# Altium PCB PCB1.PcbDoc (part 2 of 2)
Units mm, origin at the board's own origin, x right, y up, seen from the top; angles counter-clockwise.
Board outline 52.81 x 140.21 mm, 4 copper layers (Top Layer, Int1 (GND), Int2 (PWR), Bottom Layer), stack 1.566 mm thick; 98 components, 47 nets, 264 pads, 608 vias.
Unrouted connection lines stored in the file: 7.
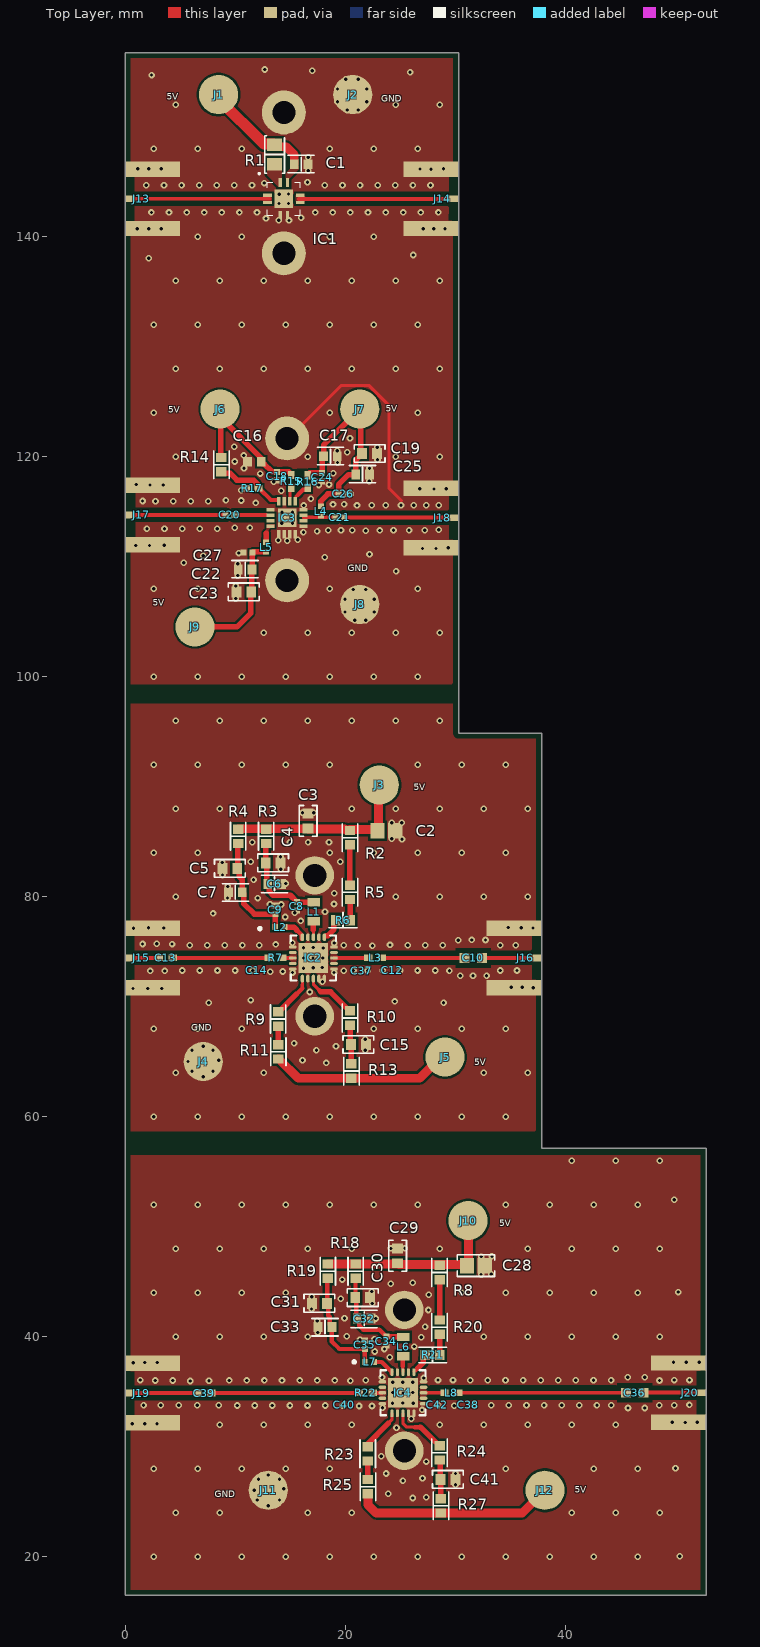
[diagram p0: Top Layer view]

## Via types
v1: diameter 0.6, hole 0.3, Top Layer to Bottom Layer, 398 vias
v2: diameter 0.6, hole 0.3, Top Layer to Bottom Layer, tented both sides, 210 vias

## Nets (pads, with @x,y where several pads share a name; then routed paths per layer and width w, separated by ;. In a path a pad name is that pad's centre, name@x,y a point inside that pad or via, vN(x,y) a via of type N, cw(c..) or ccw(c..) an arc to the next point about the centre after c; other vN are vias at no path point) (continued)
GND: (continued)
  other v2: 2.6,20 6.6,20 10.6,20 14.6,20 18.6,20 22.6,20 26.6,20 30.6,20 34.6,20 38.6,20 42.6,20 46.6,20 50.419,20.066 4.6,24 8.6,24 16.6,24 20.6,24 40.6,24 44.6,24 48.6,24 2.6,28 6.6,28 10.6,28 14.6,28 18.6,28 34.6,28 42.6,28 46.6,28 50.038,28.067 8.6,32 12.6,32 16.6,32 20.6,32 28.6,32 32.6,32 36.6,32 40.6,32 44.6,32 4.6,40 8.6,40 12.6,40 16.6,40 32.6,40 36.6,40 40.6,40 44.6,40 48.6,40 2.6,44 6.6,44 10.6,44 14.6,44 30.6,44 34.6,44 38.6,44 42.6,44 46.6,44 50.292,44.069 4.6,48 8.6,48 12.6,48 16.6,48 20.6,48 28.6,48 36.6,48 40.6,48 44.6,48 48.6,48 2.6,52 6.6,52 10.6,52 14.6,52 18.6,52 22.6,52 26.6,52 34.6,52 38.6,52 42.6,52 46.6,52 49.911,52.451 40.6,56 44.6,56 48.6,56 2.6,60 6.6,60 10.6,60 14.6,60 18.6,60 22.6,60 26.6,60 30.6,60 34.6,60 4.6,64 12.6,64 32.6,64 36.6,64 2.6,68 6.6,68 10.6,68 22.6,68 26.6,68 30.6,68 34.6,68 7.62,70.358 28.956,70.358 24.511,70.485 11.43,70.612 8.001,78.486 4.6,80 24.6,80 28.6,80 32.6,80 36.6,80 2.6,84 6.6,84 18.6,84 22.6,84 26.6,84 30.6,84 34.6,84 4.6,88 8.6,88 12.6,88 20.6,88 24.6,88 28.6,88 32.6,88 36.6,88 2.6,92 6.6,92 10.6,92 14.6,92 18.6,92 26.6,92 30.6,92 34.6,92 4.6,96 8.6,96 12.6,96 16.6,96 20.6,96 24.6,96 28.6,96 2.6,100 6.6,100 10.6,100 14.6,100 18.6,100 22.6,100 26.6,100 12.6,104 16.6,104 20.6,104 24.6,104 28.6,104 2.6,108 6.6,108 18.6,108 26.6,108 24.638,109.601 5.334,110.363 18.161,110.871 7.112,110.998 22.225,111.125 4.6,120 16.6,120 24.6,120 28.6,120 2.6,124 18.6,124 26.6,124 4.6,128 8.6,128 12.6,128 16.6,128 20.6,128 24.6,128 28.6,128 2.6,132 6.6,132 10.6,132 14.6,132 18.6,132 22.6,132 26.6,132 4.6,136 8.6,136 12.6,136 16.6,136 20.6,136 24.6,136 28.6,136 2.159,138.049 26.207,138.329 6.6,140 10.6,140 18.6,140 22.6,140 2.6,148 6.6,148 10.6,148 18.6,148 22.6,148 26.6,148 4.6,152 24.6,152 28.6,152 2.413,154.686 25.908,154.94 17.018,155.067 12.7,155.194
NetC4_2: C4.2 C6.2 C8.2 L1.2 R3.1 | length 8.9
  Top Layer w0.5: R3.1 12.808,84.824 12.808,83.061 12.876,82.993 12.876,81.265 C6.2 13.115,81.026 13.115,80.484 13.462,80.137 15.019,80.137 15.597,79.559 15.602,79.559 15.622,79.539 C8.2 15.622,79.531 15.642,79.511 L1.2
NetC5_1: C5.1 C7.1 C9.1 L2.2 R4.1 | length 10.2
  Top Layer w0.5: R4.1 10.244,84.801 10.244,82.617 C5.1 10.401,82.373 10.401,81.801 10.668,81.534 10.668,80.424 C7.1 10.809,80.264 10.809,79.361 11.75,78.42 C9.1 13.661,78.416 13.661,77.243 L2.2
NetC10_1: C10.1 L3.2 | length 7.5
  Top Layer w0.358: L3.2 C10.1
NetC10_2: C10.2 J16.1 | length 5
  Top Layer w0.358: C10.2 J16.1
NetC11_2: IC2.12 IC2.13 IC2.14 L3.1 | length 3.1
  Top Layer w0.358: IC2.13 L3.1
NetC13_1: C13.1 J15.1 | length 2.6
  Top Layer w0.358: J15.1 C13.1
NetC13_2: C13.2 R7.1 | length 8.7
  Top Layer w0.358: C13.2 R7.1
NetC15_1: C15.1 R10.1 R13.2 | length 3.6
  Top Layer w0.5: R10.1 20.491,68.291 20.491,66.615 C15.1 20.555,66.551 20.555,64.828 R13.2
NetC20_1: C20.1 J17.1 | length 8.7
  Top Layer w0.358: J17.1 C20.1
NetC20_2: C20.2 IC3.2 | length 2.9
  Top Layer w0.358: C20.2@9.933,114.688 12.827,114.688
NetC21_1: C21.1 IC3.10 IC3.11 L4.1 | length 2.9
  Top Layer w0.358: 16.257,114.45 16.3,114.493 C21.1
NetC21_2: C21.2 J18.1 | length 10
  Top Layer w0.358: C21.2 19.917,114.467 29.838,114.467 J18.1
NetC30_2: C30.2 C32.2 C34.2 L6.2 R18.1 | length 8.9
  Top Layer w0.4: R18.1 20.949,45.301 20.949,43.538 21.017,43.47 21.017,41.742 C32.2 21.306,41.453 21.306,41.012 21.659,40.658 23.116,40.658 23.688,40.086 23.693,40.086 23.774,40.005 C34.2@23.774,40 ; L6.2@25.275,40 L6.2
  Top Layer w0.5: C34.2@23.774,40 L6.2@25.275,40
NetC31_1: C31.1 C33.1 C35.1 L7.2 R19.1 | length 10.4
  Top Layer w0.4: R19.1 18.385,45.278 18.385,43.094 C31.1 18.484,42.908 18.484,41.928 18.6,41.813 18.6,41.091 C33.1 18.8,39.581 19.484,38.897 C35.1 21.802,38.893 21.802,37.72 L7.2
NetC36_1: C36.1 L8.2 | length 15.3
  Top Layer w0.358: L8.2 C36.1
NetC36_2: C36.2 J20.1 | length 5.2
  Top Layer w0.358: C36.2 47.147,34.921 52.37,34.921 J20.1
NetC37_2: IC4.12 IC4.13 IC4.14 L8.1 | length 1.9
  Top Layer w0.358: IC4.13 L8.1
NetC39_1: C39.1 J19.1 | length 6.1
  Top Layer w0.358: J19.1 C39.1
NetC39_2: C39.2 R22.1 | length 13.4
  Top Layer w0.358: C39.2 7.851,34.899 21.25,34.899 R22.1
NetC41_1: C41.1 R24.1 R27.2 | length 3.6
  Top Layer w0.5: R24.1 28.632,28.768 28.632,27.092 C41.1 28.696,27.028 28.696,25.305 R27.2
NetIC1_1: IC1.1 IC1.2 J13.1 | length 12.7
  Top Layer w0.358: J13.1@0.452,143.443 13.13,143.443
NetIC1_5: IC1.5 IC1.6 J14.1 | length 14
  Top Layer w0.358: 15.813,143.442 J14.1
NetIC1_8: IC1.8 R1.1
NetIC2_2: IC2.2 IC2.3 IC2.4 R7.2 | length 0.9
  Top Layer w0.358: R7.2 IC2.3
NetIC2_6: IC2.6 R9.2 | length 4
  Top Layer w0.29: IC2.6 16.122,72.563 16.122,72.016
  Top Layer w0.3: 16.122,71.684 16.122,72.015
  Top Layer w0.4: 15.558,71.12 16.122,71.684
  Top Layer w0.5: R9.2 13.973,69.537 15.555,71.12
NetIC2_8: IC2.8 R10.2 | length 4.9
  Top Layer w0.29: IC2.8 17.122,72.563 17.122,72.032 17.653,71.501
  Top Layer w0.4: 17.653,71.501 17.802,71.352
  Top Layer w0.5: 17.802,71.352 18.68,71.352 20.223,69.809 20.352,69.809 R10.2@20.493,69.668
NetIC2_16: IC2.16 R6.1 | length 1.9
  Top Layer w0.5: 18.288,76.454 18.415,76.454 18.988,77.027 18.988,77.699 R6.1
NetIC2_18: IC2.18 L1.1 | length 1.4
  Top Layer w0.29: IC2.18 17.12,76.937
  Top Layer w0.3: 17.12,76.937 17.145,76.962
  Top Layer w0.5: 17.127,76.98 L1.1@17.127,77.743
NetIC2_20: IC2.20 L2.1 | length 2.1
  Top Layer w0.4: 15.621,76.962 16.044,76.539 IC2.20@16.044,76.191
  Top Layer w0.5: L2.1 15.344,77.239 15.621,76.962
NetIC3_4: IC3.4 L5.2 | length 0.8
  Top Layer w0.5: L5.2 12.828,113.029
NetIC3_13: IC3.13 R16.1 | length 1.4
  Top Layer w0.3: 15.535,116.332 15.535,116.349 15.719,116.533
  Top Layer w0.4: 15.719,116.533 16.178,116.992 16.497,116.992 16.597,117.092 R16.1@16.597,117.132
NetIC3_14: IC3.14 R15.1 | length 0.9
  Top Layer w0.29: 14.986,116.332 14.986,117.05 R15.1
NetIC3_16: IC3.16 R14.1 R17.2 | length 6.4
  Top Layer w0.4: R17.2@12.208,117.117 13.26,116.065 IC3.16@13.883,116.065
  Top Layer w0.5: R14.1 8.917,118.473 9.571,118.473 10.177,117.867 11.68,117.867 12.008,117.54 12.008,117.167 12.058,117.117 R17.2 R17.2@12.208,117.117
NetIC4_2: IC4.2 IC4.3 IC4.4 R22.2 | length 0.9
  Top Layer w0.358: R22.2 22.512,34.912 IC4.3@23.38,34.912
NetIC4_6: IC4.6 R23.2 | length 3.8
  Top Layer w0.29: 23.945,32.149 24.258,32.462 24.258,33.039 IC4.6
  Top Layer w0.5: R23.2@21.98,30.19 21.986,30.19 23.945,32.149
NetIC4_8: IC4.8 R24.2 | length 5.1
  Top Layer w0.29: IC4.8 25.261,32.137 25.601,31.796
  Top Layer w0.3: 25.601,31.796 26.33,31.796 26.333,31.794 ; R24.2@28.539,30.111 R24.2
  Top Layer w0.4: 26.333,31.794 26.856,31.794
  Top Layer w0.5: 26.856,31.794 R24.2@28.539,30.111
NetIC4_16: IC4.16 R21.1 | length 2
  Top Layer w0.3: IC4.16@26.263,36.848 26.317,36.848 26.591,37.123
  Top Layer w0.5: 26.591,37.123 27.129,37.66 27.129,38.176 R21.1
NetIC4_18: IC4.18 L6.1 | length 1.5
  Top Layer w0.29: 25.258,37.313 25.258,36.795 IC4.18
  Top Layer w0.4: 25.258,37.313 25.258,38.21 L6.1
NetIC4_20: IC4.20 L7.1 | length 2.1
  Top Layer w0.29: IC4.20@24.204,36.627 IC4.20@24.204,36.843
  Top Layer w0.4: L7.1 23.331,37.716 IC4.20@24.204,36.843
NetR2_1: R2.1 R5.1 | length 3.7
  Top Layer w0.5: R5.1 R2.1
NetR5_2: R5.2 R6.2 | length 1.9
  Top Layer w0.5: R5.2 20.455,79.742 20.455,77.882 R6.2
NetR8_1: R8.1 R20.1 | length 3.7
  Top Layer w0.5: R20.1 R8.1
NetR9_1: R9.1 R11.2 | length 1.7
  Top Layer w0.5: R9.1 13.928,68.232 13.928,66.561 R11.2
NetR20_2: R20.2 R21.2 | length 1.9
  Top Layer w0.5: R20.2 28.596,40.219 28.596,38.359 R21.2
NetR23_1: R23.1 R25.2 | length 1.7
  Top Layer w0.5: R23.1 22.069,28.709 22.069,27.038 R25.2
pads on no net: IC3.3

## Polygon pours and split planes (outlines as drawn)
GND on Top Layer "NONET_L01_P-001" (solid, pour order 4): -0.476,94.107 31.877,94.107 31.877,157.48 -0.51,157.48
GND on Top Layer "NONET_L01_P-001" (solid, pour order 11): -1.016,94.361 38.989,94.361 38.989,56.007 -1.016,56.007
GND on Top Layer "NONET_L01_P-001" (solid, pour order 12): -2.159,56.521 -2.159,15.494 54.61,15.494 54.61,56.513
NetIC2_2 on Top Layer "NONET_L01_P-001" (solid, pour order 14): 14.919,74.62 15.238,74.939 15.596,74.939 15.596,73.937 15.594,73.935 15.238,73.935 14.919,74.262
NetIC4_2 on Top Layer "NONET_L01_P-001" (solid, pour order 17): 23.055,35.096 23.373,35.414 23.731,35.414 23.731,34.413 23.729,34.411 23.373,34.411 23.055,34.738
NetC37_2 on Top Layer "NONET_L01_P-001" (solid, pour order 16): 27.465,34.737 27.147,34.419 26.789,34.419 26.789,35.42 26.791,35.422 27.147,35.422 27.465,35.095
NetC11_2 on Top Layer "NONET_L01_P-001" (solid, pour order 15): 19.324,74.263 19.006,73.944 18.648,73.944 18.648,74.946 18.65,74.948 19.006,74.948 19.324,74.621
NetIC3_4 on Top Layer "NONET_L01_P-001" (solid, pour order 9): 12.578,113.037 12.578,113.56 12.588,113.56 12.866,113.838 13.602,113.838 13.602,113.546 13.605,113.543 13.079,113.018 13.079,112.951 12.581,112.951 12.578,112.953
NetIC1_1 on Top Layer "NONET_L01_P-001" (solid, pour order 0): 12.514,143.62 12.556,143.662 13.342,143.662 13.342,143.191 13.329,143.178 13.287,143.22 12.563,143.22 12.518,143.264
NetIC1_5 on Top Layer "NONET_L01_P-001" (solid, pour order 3): 16.377,143.618 16.252,143.743 15.539,143.743 15.539,143.213 15.569,143.183 16.296,143.183 16.377,143.263
5V on Top Layer "NONET_L01_P-001" (solid, pour order 2): 14.614,145.32 14.614,145.768 15.253,146.407 15.778,146.407 15.778,146.131 14.913,145.266 14.913,145.265 14.614,145.265
NetIC1_8 on Top Layer "NONET_L01_P-001" (solid, pour order 1): 13.956,144.53 12.917,145.569 12.917,146.11 14.264,146.11 14.253,146.099 14.253,144.531
no net on Top Solder "NONET_L01_P-001" (solid): -0.107,36.948 -0.107,32.902 52.921,32.902 52.921,36.948
no net on Top Solder "NONET_L01_P-001" (solid): -0.112,76.472 -0.112,72.426 37.968,72.426 37.968,76.472
no net on Top Solder "NONET_L01_P-001" (solid): 0,117.094 0,112.294 30.416,112.294 30.416,117.094
no net on Top Solder "NONET_L01_P-001" (solid): 0,145.389 30.394,145.389 30.394,141.509 0,141.509
GND on Bottom Layer "NONET_L01_P-001" (solid, pour order 13): 52.813,16.51 52.813,57.017 52.817,57.021 52.686,57.152 37.863,57.152 37.863,94.869 30.314,94.869 30.314,156.718 0,156.718 0,16.51
no net on Bottom Solder "NONET_L01_P-001" (solid): 52.813,16.51 52.813,57.017 52.817,57.021 52.686,57.152 37.863,57.152 37.863,94.869 30.314,94.869 30.314,156.718 0,156.718 0,16.51
GND on Int2 (PWR) (split plane): 37.759,56.651 37.761,56.651 37.763,56.65 37.811,56.646 37.859,56.641 37.861,56.641 37.863,56.641 37.873,56.642 52.302,56.642 52.302,17.02 0.51,17.02 0.51,56.598 37.747,56.655
GND on Int2 (PWR) (split plane): 29.803,94.869 29.813,94.769 29.842,94.674 29.889,94.585 29.953,94.508 30.03,94.445 30.119,94.397 30.214,94.368 30.314,94.359 37.352,94.359 37.353,58.659 0.51,58.603 0.51,97.423 29.803,97.423
GND on Int2 (PWR) (split plane): 29.803,99.427 0.51,99.427 0.51,156.208 29.803,156.208
GND on Int1 (GND) (split plane): 52.302,17.02 0.51,17.02 0.51,56.516 38.117,56.641 38.12,56.642 52.302,56.642
GND on Int1 (GND) (split plane): 29.803,94.869 29.813,94.769 29.842,94.674 29.889,94.585 29.953,94.508 30.03,94.445 30.119,94.397 30.214,94.368 30.314,94.359 37.352,94.359 37.353,58.643 0.51,58.52 0.51,97.423 29.803,97.423
GND on Int1 (GND) (split plane): 29.803,99.427 0.51,99.427 0.51,156.208 29.803,156.208

## Other copper
Top Layer:
  pour cut-out: 0.508,97.536 29.801,97.536 29.801,99.314 0.508,99.314
  pour cut-out: 0.508,56.515 39.116,56.515 39.116,58.674 0.508,58.674
  pour cut-out: 51.913,32.802 51.913,36.927 52.294,36.927 52.294,32.802
  pour cut-out: 0.508,32.893 0.508,36.892 0.889,36.892 0.889,32.893
  pour cut-out: 44.713,33.995 44.713,34.237 47.973,34.237 47.973,33.995
  pour cut-out: 44.713,35.597 44.713,35.832 47.973,35.832 47.973,35.597
  pour cut-out: 27.691,34.347 27.691,34.237 52.297,34.237 52.297,34.347
  pour cut-out: 27.704,35.487 27.704,35.597 52.195,35.597 52.195,35.487
  pour cut-out: 0.889,34.212 0.889,34.309 22.931,34.368 22.931,34.212
  pour cut-out: 0.439,116.702 0.958,116.702 0.958,112.697 0.439,112.697
  pour cut-out: 29.406,116.469 29.838,116.469 29.838,112.465 29.406,112.465
  pour cut-out: 36.967,76.447 37.573,76.447 37.573,72.443 36.968,72.443
  pour cut-out: 0.508,76.44 0.899,76.44 0.899,72.436 0.508,72.436
  pour cut-out: 22.906,35.587 22.906,35.462 0.889,35.462 0.889,35.587
  pour cut-out: 36.967,73.76 36.967,73.871 19.487,73.871 19.487,73.76
  pour cut-out: 30.014,73.517 30.014,73.787 33.274,73.787 33.274,73.517
  pour cut-out: 30.014,75.057 30.014,75.36 33.274,75.36 33.274,75.057
  pour cut-out: 19.477,75.12 19.477,75.01 36.967,75.01 36.967,75.12
  pour cut-out: 14.753,73.871 14.753,73.76 0.899,73.76 0.899,73.871
  pour cut-out: 14.753,75.12 14.753,74.948 0.899,74.948 0.899,75.12
  pour cut-out: 15.598,118.904 15.539,118.845 15.539,116.913 15.871,116.913 16.135,117.177 16.135,118.892 16.098,118.892 16.079,118.904
  pour cut-out: 29.411,145.468 29.718,145.468 29.718,141.442 29.401,141.442
  pour cut-out: 0.53,145.44 0.895,145.44 0.895,141.413 0.529,141.413 0.519,141.423
Bottom Layer:
  pour cut-out: -4.572,97.536 34.307,97.536 34.307,99.314 -4.572,99.314
  pour cut-out: -0.508,56.515 54.483,56.515 54.483,58.674 -0.508,58.674
Int1 (GND) (plane layer: these items are gaps in the copper):
  lines w0.2: 38.111,57.383 38.246,57.249 ; -0.16,57.256 -0.16,57.256
  lines w2: 0,98.425 30.353,98.425 ; 0.067,57.517 38.114,57.644
Int2 (PWR) (plane layer: these items are gaps in the copper):
  lines w2: -0.066,57.6 38.227,57.658 ; 0,98.425 30.48,98.425

## Silkscreen, mask and mechanical layers (free items; w line width, h text height)
Top Overlay:
  text "5V" at 3.78,152.198 h1
  text "GND" at 23.299,152.018 h1
  text "5V" at 23.719,123.877 h1
  text "5V" at 3.907,123.75 h1
  text "GND" at 20.241,109.374 h1
  text "5V" at 2.51,106.224 h1
  text "5V" at 26.259,89.46 h1
  text "GND" at 6.017,67.591 h1
  text "5V" at 31.72,64.441 h1
  text "5V" at 34.006,49.836 h1
  text "5V" at 40.864,25.579 h1
  text "GND" at 8.176,25.173 h1
Mechanical 1:
  lines w0.2: 37.863,57.151 37.863,94.869 30.314,94.869 30.314,156.718 0,156.718 0,156.083 0,16.51 52.812,16.51 52.812,16.51 52.812,56.007 52.812,57.152 37.863,57.152

## Text inside footprints (layer, text, board x,y; h text height)
J13: Top Assembly "PCB Thickness 1.6mm" at -10.2,147.04 h0.8 r270; Top Assembly "PCB End" at -0.7,144.84 h0.8 r270
J14: Top Assembly "PCB Thickness 1.6mm" at 40.514,139.84 h0.8 r90; Top Assembly "PCB End" at 31.014,142.04 h0.8 r90
J15: Top Assembly "PCB End" at -0.7,75.84 h0.8 r270; Top Assembly "PCB Thickness 1.6mm" at -10.2,78.04 h0.8 r270
J16: Top Assembly "PCB End" at 38.563,73.04 h0.8 r90; Top Assembly "PCB Thickness 1.6mm" at 48.063,70.84 h0.8 r90
J17: Top Assembly "PCB End" at -0.7,116.104 h0.8 r270; Top Assembly "PCB Thickness 1.6mm" at -10.2,118.304 h0.8 r270
J18: Top Assembly "PCB End" at 31.014,113.04 h0.8 r90; Top Assembly "PCB Thickness 1.6mm" at 40.514,110.84 h0.8 r90
J19: Top Assembly "PCB End" at -0.7,36.292 h0.8 r270; Top Assembly "PCB Thickness 1.6mm" at -10.2,38.492 h0.8 r270
J20: Top Assembly "PCB End" at 53.524,33.525 h0.8 r90; Top Assembly "PCB Thickness 1.6mm" at 63.024,31.325 h0.8 r90